# Altium PCB PCB Design.PcbDoc
Units mil, origin at the board's own origin, x right, y up, seen from the top; angles counter-clockwise.
Board outline 2100 x 900 mil, 2 copper layers (Top Layer, Bottom Layer), stack 62.249 mil thick; 30 components, 49 nets, 160 pads, 138 vias.
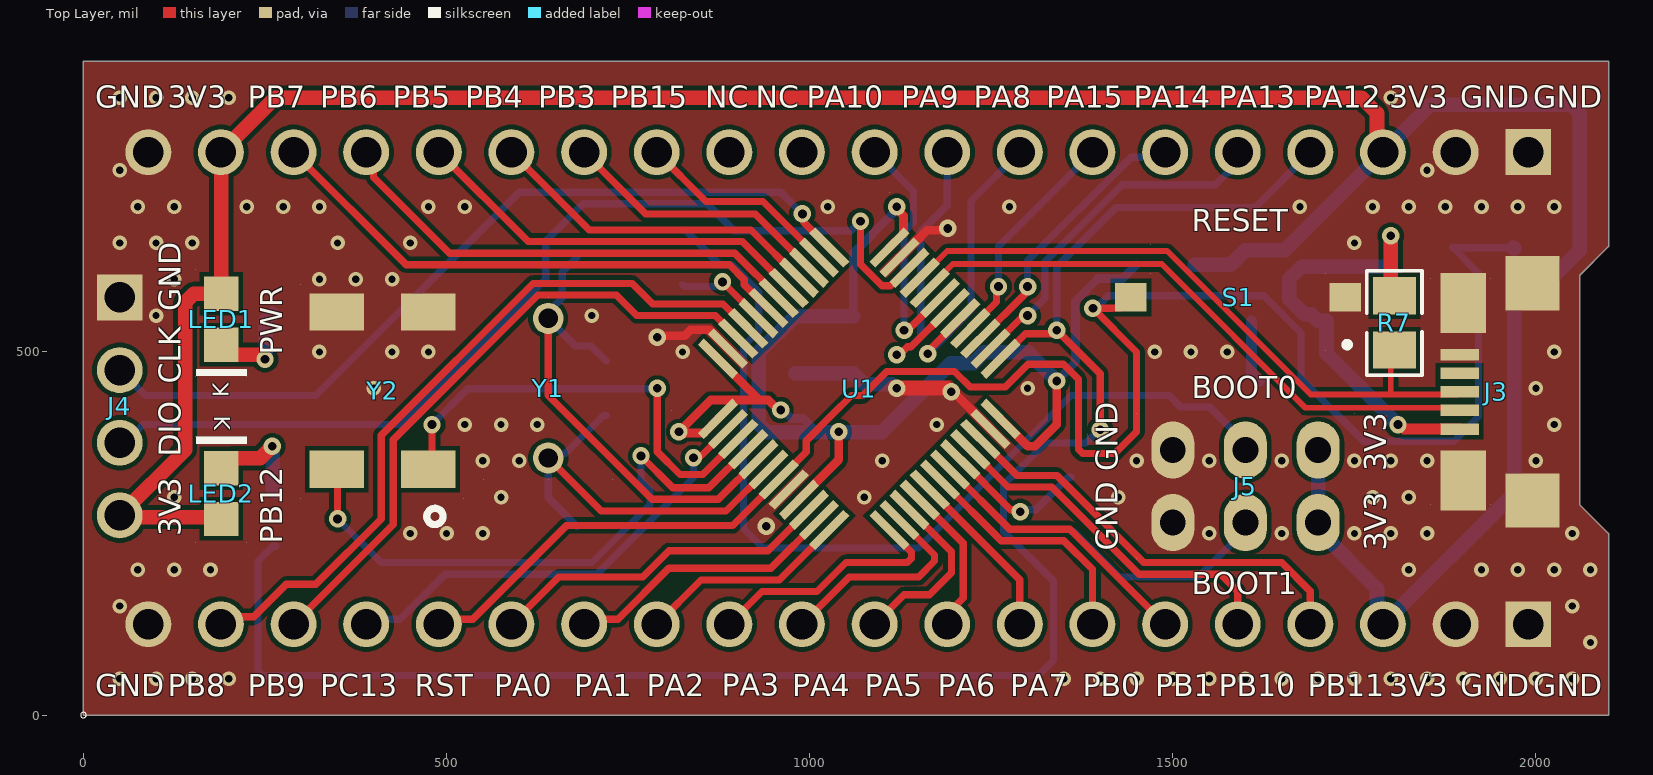
[diagram p0: Top Layer view]
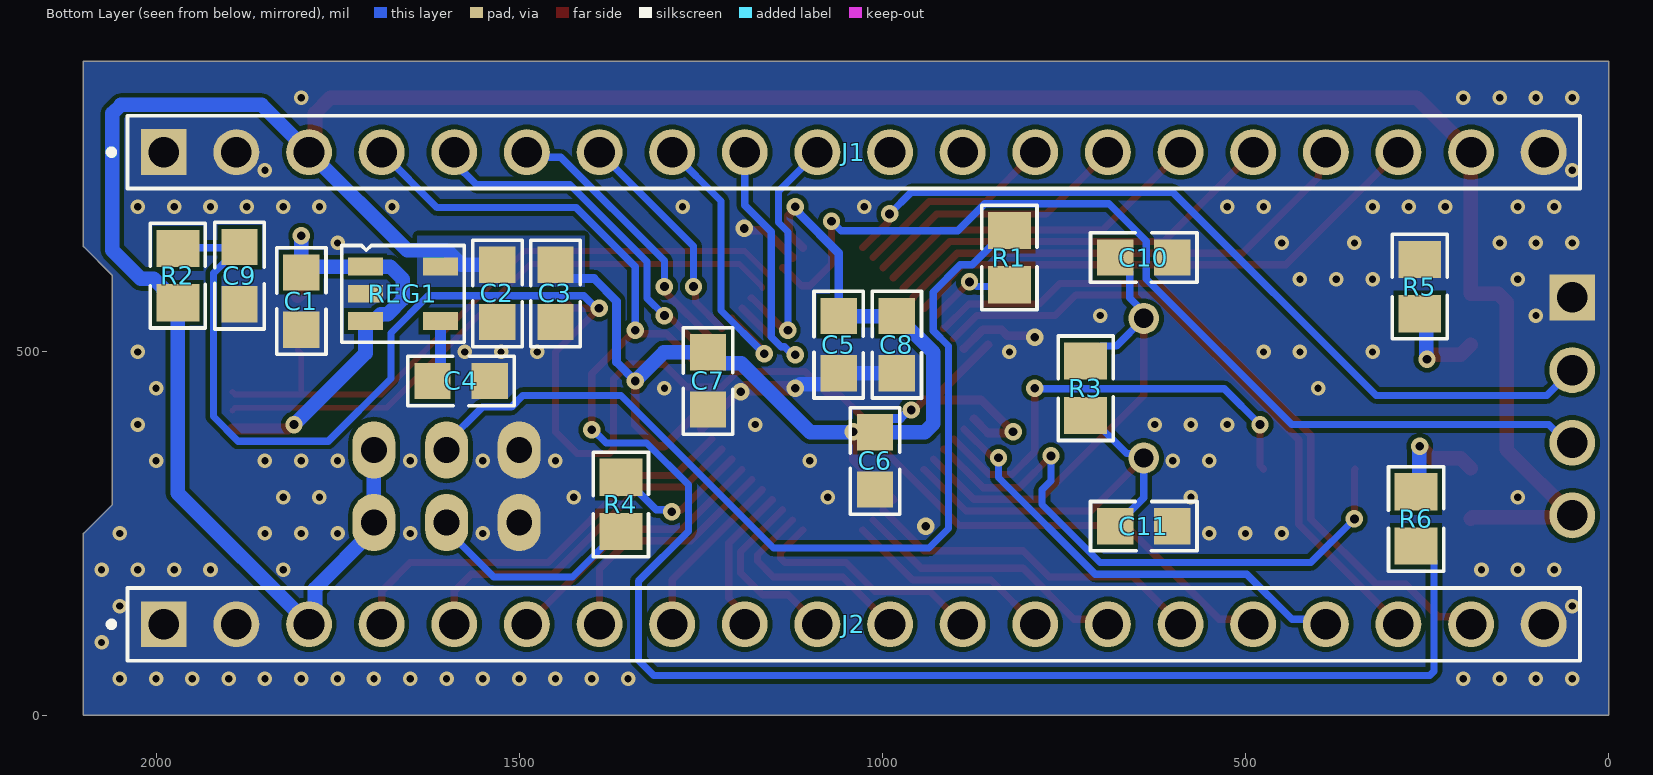
[diagram p1: Bottom Layer view, seen from below]

## Layer stack, top to bottom
Top Solder: solder mask 0.4, Solder Resist, Dk 3.5
Top Layer: signal copper 1.4
Dielectric 1: dielectric 59.4488, FR-4, Dk 4.6
Bottom Layer: signal copper 1.4
Bottom Solder: solder mask 0.4, Solder Resist, Dk 3.5

## Board outline
0,900 0,0 2100,0 2100,250 2060,290 2060,605 2100,645 2100,900

## Design rules (kind name [scope] priority, off if disabled: settings)
Clearance [All] p1: gap=6 ignorepadtopadclearanceinfootprint=TRUE
DiffPairsRouting DiffPair_90DiffPairsRouting [InDifferentialPairClass('diff_90')] p1: maxlimit=10 minlimit=10 mostfreqgap=10 toplayer_minwidth=8 toplayer_maxwidth=8 toplayer_prefwidth=8 bottomlayer_minwidth=8 bottomlayer_maxwidth=8 bottomlayer_prefwidth=8 maxuncoupledlength=500
DiffPairsRouting [All] p2: maxlimit=10 minlimit=10 mostfreqgap=10 toplayer_minwidth=15 toplayer_maxwidth=15 toplayer_prefwidth=15 bottomlayer_minwidth=15 bottomlayer_maxwidth=15 bottomlayer_prefwidth=15 maxuncoupledlength=500
MatchedLengths DiffPair_90MatchedLengths [InDifferentialPairClass('diff_90')] p1: tolerance=1000 checknetsindiffpair=FALSE checkdiffpairvsdiffpair=TRUE checkxsignals=TRUE checkothers=TRUE
MinimumSolderMaskSliver [All] p1: minsoldermaskwidth=0
PolygonConnect [All] p1: connectstyle=Direct reliefconductorwidth=10 reliefentries=4 polygonreliefangle="90 Angle" airgapwidth=10
RoutingVias [All] p1: holewidth=12 width=24 viastyle="Through Hole" minholewidth=12 minwidth=24 maxholewidth=12 maxwidth=24
SilkToSilkClearance [All] p1: silktosilkclearance=6
SilkToSolderMaskClearance [IsPad] p1: minsilkscreentomaskgap=0 clearancetoexposedcopper=TRUE
SolderMaskExpansion [All] p1: expansion=4 istentingtop=FALSE
SupplyNets "Schematic Supply Nets_2" [InNet('+3V3')] p1: voltage=0.000
SupplyNets "Schematic Supply Nets_1" [InNet('+5')] p2: voltage=0.000
SupplyNets "Schematic Supply Nets" [InNet('GND')] p3: voltage=0.000
Width [All] p1: maxlimit=40 minlimit=10 preferedwidth=10 minimp=50.000000 maximp=50.000000 favimp=50.000000
26 further rules are at their usual default settings.

## Classes and differential pairs
differential pair class diff_90: D
component class Schematic: C1 C2 C3 C4 J1 J2 J3 R7 REG1
component class Schematic2: C5 C6 C7 C8 C9 C10 C11 J4 J5 LED1 LED2 R1 R2 R3 R4 R5 R6 S1 U1 Y1 Y2
differential pair D: +D_P -D_N

## Components (designator, comment, footprint, x,y, rotation, side; value= is the part's Value field where it differs from the comment)
C1 "0.1uF" CAP_0805 1800,570 r90 bottom
C2 "0.1uF" CAP_0805 1530,580.63 r90 bottom
C3 "1uF" CAP_0805 1450,580.63 r90 bottom
C4 "22pF" CAP_0805 1580,460 r0 bottom
C5 "0.1uF" CAP_0805 1060,510 r90 bottom
C6 "0.1uF" CAP_0805 1010,350 r90 bottom locked
C7 "0.1uF" CAP_0805 1240,460 r90 bottom locked
C8 "0.1uF" CAP_0805 980,510 r90 bottom
C9 "0.1uF" CAP_0805 1885,605 r90 bottom
C10 "22pF" CAP_0805 640,630 r0 bottom locked
C11 "22pF" CAP_0805 640,260 r0 bottom locked
J1 "M20-9992045" HARWIN_M20-9992045 1039.37,775 r180 bottom
J2 "M20-9992045" HARWIN_M20-9992045 1039.37,125 r180 bottom
J3 "MICRO USB2.0" CON_10118192-0001LF_SMD 1945,445 r90 top locked
J4 "M20-9960445" HARWIN_M20-9960445 -88.98,425 r270 top locked
J5 "2X3 Berg Strip" CON6_100_59D78_TH_ST_Duplicate 1700,365 r180 top locked
LED1 "RED LED" LED_0805 190,545 r90 top locked
LED2 "RED LED" LED_0805 190,305 r270 top locked
R1 "10K" RES_0805 825,630 r270 bottom locked
R2 "10K" RES_0805 1970,605 r90 bottom
R3 "10Mohm" RES_0805 720,450 r90 bottom locked
R4 "10K" RES_0805 1360,290 r270 bottom
R5 "1K" RES_0805 260,590 r90 bottom locked
R6 "1K" RES_0805 265,270 r270 bottom locked
R7 "10K" RES_0805 1805,540 r90 top locked
REG1 "RT9193-33GB" SOT23-5 1660,580 r270 bottom
S1 "TS09-63-25-WT-160-SMT-TR" SW_TS09-63-25-WT-160-SMT-TR 1590,575 r180 top
U1 "STM32F103C8T6" LQFP-48_19.6_393_58X11_SMD 1068.3,449.26 r45 top
Y1 "ATS08A-E" XTAL_HC49P488W43L1085T450H368 640,450 r270 top locked
Y2 "32.768KHz" "XTAL_MC-405 32.7680K-G3" 349.02,338.46 r90 top locked

## Footprints (in the part's own frame and the unit in brackets; to place one, negate y for a bottom-side part, rotate by r counter-clockwise, add the part's x,y. Pads: shape width x height; smd on the part's side, far side on the other; paste and mask are expansions set on the pad)
CAP_0805 [mil] "Ceramic Capacitor"
  rect 50x50 smd mask+3: 1(-39.37,0) 2(39.37,0)
  silkscreen extent -73,-34 73,34, body extent -39,-25 39,25, height 31
CON6_100_59D78_TH_ST_Duplicate [mm] "Berg strip"
  oval 1.5x2 hole 0.9: 1(0,0) 2(0,2.54) 3(2.54,0) 4(2.54,2.54) 5(5.08,0) 6(5.08,2.54)
  silkscreen extent -1.27,-1.27 6.35,3.81, body extent -1.07,-1.27 6.15,3.56, height 8.18
CON_10118192-0001LF_SMD [mm] "USB2.0 MICRO"
  rect 0.4x1.35 smd: 1(-1.3,1.275) 2(-0.65,1.275) 3(0,1.275) 4(0.65,1.275) 5(1.3,1.275)
  rect 2.1x1.6 smd: 6(-3.1,1.15) 7(3.1,1.15)
  rect 1.9x1.9 smd: 8(-3.8,-1.275) 9(3.8,-1.275)
  silkscreen extent -3.95,0.18 3.95,2.3, body extent -4.04,-3.94 4.04,1.66, height 2.81
HARWIN_M20-9960445 [mm]
  rect 1.605x1.605 / inner round 1.605 / far side rect 1.605x1.605 hole 1.07: 1(-3.81,3.53)
  round 1.605 hole 1.07: 2(-1.27,3.53) 3(1.27,3.53) 4(3.81,3.53)
  silkscreen extent 10.7,2.16 10.89,2.36, body extent -5.08,-4.33 5.08,4.83, height 5.33
HARWIN_M20-9992045 [mm]
  rect 1.605x1.605 / inner round 1.605 / far side rect 1.605x1.605 hole 1.07 mask+0.102: 1(-24.13,0)
  round 1.605 hole 1.07 mask+0.102: 2(-21.59,0) 3(-19.05,0) 4(-16.51,0) 5(-13.97,0) 6(-11.43,0) 7(-8.89,0) 8(-6.35,0) 9(-3.81,0) 10(-1.27,0) 11(1.27,0) 12(3.81,0) 13(6.35,0) 14(8.89,0) 15(11.43,0) 16(13.97,0) 17(16.51,0) 18(19.05,0) 19(21.59,0) 20(24.13,0)
  silkscreen extent -26.06,-1.27 25.4,1.27, body extent -25.4,-1.27 25.4,1.27, height 8.74
LED_0805 [mm] "LED"
  rect 1.2x1.2 smd mask+0.076: A(0.889,0) K(-0.889,0)
  silkscreen extent -1.99,-0.89 1.73,0.89, body extent -1.01,-0.62 1.01,0.63, height 1.1
LQFP-48_19.6_393_58X11_SMD [mm] "48LQFP"
  rect 1.7x0.3 smd mask+0.076: 1(-4.238,2.75) 2(-4.238,2.25) 3(-4.238,1.75) 4(-4.238,1.25) 5(-4.238,0.75) 6(-4.238,0.25) 7(-4.238,-0.25) 8(-4.238,-0.75) 9(-4.238,-1.25) 10(-4.238,-1.75) 11(-4.238,-2.25) 12(-4.238,-2.75) 25(4.238,-2.75) 26(4.238,-2.25) 27(4.238,-1.75) 28(4.238,-1.25) 29(4.238,-0.75) 30(4.238,-0.25) 31(4.238,0.25) 32(4.238,0.75) 33(4.238,1.25) 34(4.238,1.75) 35(4.238,2.25) 36(4.238,2.75)
  rect 0.3x1.7 smd mask+0.076: 13(-2.75,-4.238) 14(-2.25,-4.238) 15(-1.75,-4.238) 16(-1.25,-4.238) 17(-0.75,-4.238) 18(-0.25,-4.238) 19(0.25,-4.238) 20(0.75,-4.238) 21(1.25,-4.238) 22(1.75,-4.238) 23(2.25,-4.238) 24(2.75,-4.238) 37(2.75,4.238) 38(2.25,4.238) 39(1.75,4.238) 40(1.25,4.238) 41(0.75,4.238) 42(0.25,4.238) 43(-0.25,4.238) 44(-0.75,4.238) 45(-1.25,4.238) 46(-1.75,4.238) 47(-2.25,4.238) 48(-2.75,4.238)
  silkscreen extent -5.16,-5.41 5.61,4.11, body extent -4.5,-4.5 4.5,4.5, height 1.7
RES_0805 [mm] "Resister"
  rect 1.3x1.5 smd mask+0.076: 1(0.95,0) 2(-0.95,0)
  silkscreen extent -1.83,-0.97 1.83,0.97, body extent -1,-0.63 1,0.62, height 0.5
SOT23-5 [mm] "CASE: SOT"
  rect 0.62x1.22 smd mask+0.076: 1(-0.953,-1.31) 2(-0.003,-1.31) 3(0.947,-1.31) 4(0.952,1.31) 5(-0.953,1.31)
  silkscreen extent -1.69,-2.14 1.69,2.14, body extent -1.5,-1.5 1.5,1.5, height 1.41
SW_TS09-63-25-WT-160-SMT-TR [mm]
  rect 1.1x1 smd: 1(-3.75,0) 2(3.75,0)
  silkscreen extent -3.91,-1.85 3.05,1.85, body extent -4.05,-1.85 4.05,1.85, height 2.5
XTAL_HC49P488W43L1085T450H368 [mm]
  round 1.08 hole 0.68: 1(-2.44,0) 2(2.44,0)
  silkscreen extent -3.17,-2.25 3.18,2.25, body extent -5.43,-2.25 5.43,2.25, height 3.68
"XTAL_MC-405 32.7680K-G3" [mm] "Crystal"
  rect 1.3x1.9 smd: 1(0,-3.2) 2(5.5,-3.2) 3(5.5,0) 4(0,0)
  silkscreen extent -1.93,-4.44 6.48,1.27, body extent -1.02,-4.44 6.48,1.27, height 3.6

## Part data
C1 C2 C5 C6 C7 C8 C9: library part CAP_0.1uF-50V-5%-0805, "0.1µF ±5% 50V Ceramic Capacitor X7R 0805 (2012 Metric)", Case/Package="0805 (2012 Metric)", Manufacturer=KEMET, Manufacturing Part Number=C0805C104J5RACTU, Supplier Part Number-1=399-1171-1-ND, Supplier-1=Digikey
C3: library part CAP_1uF-50V-5%-0805, "1µF ±5% 50V Ceramic Capacitor X7R 0805 (2012 Metric)", Case/Package="0805 (2012 Metric)", Manufacturer=Yageo, Manufacturing Part Number=CC0805JKX7R9BB105, Supplier Part Number-1=311-3498-1-ND, Supplier-1=Digikey
C4 C10 C11: library part CAP_22pF-50V-5%-0805, "22pF ±5% 50V Ceramic Capacitor C0G, NP0 0805 (2012 Metric)", Case/Package=0805, Manufacturer=KEMET, Manufacturer Part Number=C0805C220J5GACTU, Supplier Part Number-1=399-1113-1-ND, Supplier-1=Digikey
J1 J2: "2.54mm (0.1\") Pitch SIL Vertical Throughboard Pin Header, 6.1mm mating pin height, gold (hi-temp mould), 20 contacts", Package=None, Availability=Unavailable, Check_prices=https://www.snapeda.com/parts/M20-9992045/Harwin/view-part/?ref=eda, MF=Harwin, MP=M20-9992045, Price=None, SnapEDA_Link=https://www.snapeda.com/parts/M20-9992045/Harwin/view-part/?ref=snap
J3: library part CON-USB_10118192-0002LF-SMD, "USB - micro B USB 2.0 Receptacle Connector 5 Position Surface Mount, Right Angle", Case/Package=SMD, Manufacturer="Amphenol ICC (FCI)", Manufacturing Part Number=10118192-0002LF, Supplier Part Number-1=609-5379-1-ND, Supplier-1=Digikey
J4: "2.54mm (0.1) Pitch SIL Horizontal Throughboard Pin Header, 6.1mm mating pin height, gold (hi-temp mould), 4 contacts", Package=None, Check_prices=https://www.snapeda.com/parts/M20-9960445/Harwin+Inc./view-part/?ref=eda, MF=Harwin, MP=M20-9960445, SnapEDA_Link=https://www.snapeda.com/parts/M20-9960445/Harwin+Inc./view-part/?ref=snap
J5: library part CON-BS-PLG_2X3-100-TH-ST, "6 pin, 2 row, 2.54mm pitch bergstrip", Case/Package=TH, Manufacturer=NA, Manufacturer Part Number=NA, Supplier Part Number-1=NA, Supplier-1=NA
LED1 LED2: library part LED-RED_10mA-0805, "Red 621nm LED Indication - Discrete 2V 0805 (2012 Metric)", Case/ Package=0805, Manufacturer="Lite-On Inc.", Manufacturer Part Number=LTST-C170EKT, Supplier Part Number-1=160-1178-1-ND, Supplier-1=Digikey
R1 R2 R4 R7: library part RES_10K-0.125W-1%-0805, "10 kOhms ±1% 0.125W, 1/8W Chip Resistor 0805 (2012 Metric) Moisture Resistant Thick Film", Case/Package=0805, Manufacturer=Yageo, Manufacturing Part Number=RC0805FR-0710KL, Supplier Part Number-1=311-10.0KCRCT-ND, Supplier-1=Digikey
R3: library part RES_10MOHM-0.125W-1%-0805, "10 MOhms ±1% 0.125W, 1/8W Chip Resistor 0805 (2012 Metric) Automotive AEC-Q200, High Voltage Thick Film", Case/Package="0805 (2012 Metric)", Manufacturer="Rohm Semiconductor", Manufacturing Part Number=KTR10EZPF1005, Supplier Part Number-1=RHM10.0MAHCT-ND, Supplier-1=Digikey
R5 R6: library part RES_1K-0.125W-1%-0805, "1 kOhms ±1% 0.125W, 1/8W Chip Resistor 0805 (2012 Metric) Moisture Resistant Thick Film", Case/Package=0805, Manufacturer=垈㎵á, Manufacturer Part Number=RC0805FR-071KL, Supplier Part Number-1=311-1.00KCRCT-ND, Supplier-1=Digikey
REG1: library part REG_3.3V-5.5V-0.3A-SOT-23-5, "Linear Voltage Regulator IC 1 Output 300mA SOT-23-5", Case/ Package=SOT-23-5, Manufacturer="Richtek USA Inc.", Supplier Part Number-1=1028-1014-1-ND, Manufacturer Part Number=RT9193-33GB, Supplier-1=Digikey
S1: "6.1 x 3.7 mm, 2.5 mm Actuator Height, 160 gf, White, Surface Mount, SPST, Tactile Switch", Package=None, Check_prices=https://www.snapeda.com/parts/TS09-63-25-WT-160-SMT-TR/Same+Sky/view-part/?ref=eda, MF="Same Sky", MP=TS09-63-25-WT-160-SMT-TR, SnapEDA_Link=https://www.snapeda.com/parts/TS09-63-25-WT-160-SMT-TR/Same+Sky/view-part/?ref=snap
U1: library part "IC-STM32F103C8T6 _1", "ARM® Cortex®-M3 STM32F1 Microcontroller IC 32-Bit 72MHz 64KB (64K x 8) FLASH", Case/Package=48-LQFP, Manufacturer=STMicroelectronics, Supplier Part Number-1=497-6063-ND, Manufacturer Part Number=STM32F103C8T6, Supplier-1=Digikey
Y1: "8 MHz Â±30ppm Crystal 20pF 60 Ohms HC-49/US", Package="HC-49/US CTS-Frequency Controls", Check_prices=https://www.snapeda.com/parts/ATS08A-E/CTS+Components/view-part/?ref=eda, MF=CTS, MP=ATS08A-E, SnapEDA_Link=https://www.snapeda.com/parts/ATS08A-E/CTS+Components/view-part/?ref=snap
Y2: library part "XTAL_32.768KHz-MC-405 32.7680K-G3", "Crystals SMD AT XTL MHZ +/-50PPM 12.5 PF 250 T/R", Case/Package=SMD, Manufacturer=Epson, Manufacturing Part Number="MC-405 32.7680K-G3: ROHS", Supplier Part Number-1=732-MC405327680KG3RS, Supplier-1=Mouser

## Via types
v1: diameter 20, hole 10, Top Layer to Bottom Layer, tented both sides, 106 vias
v2: diameter 24, hole 12, Top Layer to Bottom Layer, tented both sides, 32 vias

## Nets (pads, with @x,y where several pads share a name; then routed paths per layer and width w, separated by ;. In a path a pad name is that pad's centre, name@x,y a point inside that pad or via, vN(x,y) a via of type N, cw(c..) or ccw(c..) an arc to the next point about the centre after c; other vN are vias at no path point)
+3V3: C2.2 C3.2 C5.2 C6.2 C7.2 C8.2 J1.3 J1.19 J2.3 J4.4 J5.1 J5.2 LED1.A LED2.A R2.2 REG1.5 U1.1 U1.9 U1.24 U1.36 U1.48 | length 6015.4
  Top Layer w12: U1.48@854.28,510.04 854.41,510.04 U1.48 930.69,433.76 ; U1.1 854.41,388.49 821.51,388.49 v2(820,390) 863.76,433.76 930.69,433.76 ; v2(960,420) 956.75,420 942.99,433.76 930.69,433.76 ; U1.9 1040,351.37 v2(1040,390) ; U1.36 1129.08,663.15 1129.08,687.67 1120,696.75 v2(1120,700) ; U1.24 1300.37,370.31 1310.31,370.31 1340,400 v2(1340,460)
  Top Layer w20: LED2.A 187.5,272.5 52.5,272.5 J4.4 140,365 140,568.28 151.72,580 LED1.A 189.69,580.32 189.69,774.68 J1.19 264.37,850 1760,850 1781.11,828.89 1781.11,783.26 J1.3
  Bottom Layer w12: v2(960,420) 963.25,420 974.87,408.37 991,408.37 C6.2 ; C5.2 1060,636.06 1114,690.06 1114,690.75 1120,696.75 v2(1120,700) ; v2(1340,460) 1366,486 1366,569.94 1397.06,601 1431,601 C3.2
  Bottom Layer w20: C5.2 C8.2 930,499.37 930,401.09 941.72,389.37 C6.2 1099.37,389.37 1194.37,484.37 1225,484.37 C7.2 1300.63,499.37 v2(1340,460) ; C2.2 1580,620 1600,640 1654.37,640 J1.3 1854.37,840 2048.28,840 2060,828.28 2060,640 2020.81,600.81 2003.22,600.81 1989.53,587.13 1989.53,583.19 1973.94,567.6 R2.2 1970,305.63 J2.3 1781.11,133.26 1781.11,174.05 1700,255.16 J5.2 J5.1
+5: C1.2 J3.1 R7.1 REG1.1 REG1.3 | length 648
  Top Layer w15: v2(1810,400) 1812.44,400 1818.62,393.82 J3.1
  Top Layer w20: v2(1800,660) 1800,582.4 R7.1
  Bottom Layer w20: v2(1800,660) 1800,617.21 C1.2 1792.17,617.21 1711.87,617.21 REG1.1 1711.28,617.21 1677.21,617.21 1660,600 1660,572.83 1680.93,551.9 1690.57,551.9 1699.77,542.7 REG1.3 1711.58,498.42 v2(1810,400)
BOOT0: J5.3 R1.2 | length 1300.5
  Bottom Layer w10: R1.2 828.93,667.4 876.33,620 892.53,620 930,582.53 930,529.07 909,508.07 909,256.86 935.86,230 1149.88,230 1359.88,440 1495.07,440 1511.08,424 1550.85,424 1600,374.84 J5.3
BOOT1: J5.4 R4.1 | length 302.8
  Bottom Layer w10: R4.1 1363.93,252.6 1426.53,190 1534.84,190 1600,255.16 J5.4
D_N: J3.2 U1.32 | length 827.1
  Top Layer w8: U1.32 1165.4,589.31 1196.99,620.9 1484.69,620.9 1682.39,423.2 1800,423.2 1862.35,423.2 1862.43,423.13 1891.09,423.13 J3.2
D_P: J3.3 R7.2 U1.33 | length 905.5
  Top Layer w8: U1.33 1152.68,602.04 1189.54,638.9 1492.15,638.9 1689.84,441.2 1800,441.2 ; R7.2 1800,497.6 1800,441.2 ; J3.3 1891.09,441.28 1862.43,441.28 1862.35,441.2 1800,441.2
GND: C1.1 C2.1 C3.1 C4.1 C5.1 C6.1 C7.1 C8.1 C9.1 C10.1 C11.1 J1.1 J1.2 J1.20 J2.1 J2.2 J2.20 J3.5 J3.6 J3.7 J3.8 J3.9 J4.1 J5.5 J5.6 R5.1 REG1.2 S1.1 U1.8 U1.23 U1.35 U1.47 Y2.2 Y2.3 | length 496.4
  Top Layer w12: v2(790,520) 792.3,522.3 827.77,522.3 836,530.53 861.63,530.53 887.55,504.61 U1.47 ; U1.35 1161.47,667.7 1187.7,667.7 v2(1190,670) ; v2(1194.8,445.2) 1197.5,445.2 1248.79,393.92 U1.23
  Top Layer w20: v2(1120,450) 1188.92,450 1193.72,445.2 v2(1194.8,445.2)
  Bottom Layer w20: C8.1 C5.1 1075,455.63 1113.28,455.63 1118.92,450 v2(1120,450)
  other v1: 50,50 100,50 150,50 200,50 1350,50 1400,50 1450,50 1500,50 1550,50 1600,50 1650,50 1700,50 1750,50 1800,50 1850,50 1900,50 1950,50 2000,50 2050,50 2075,100 50,150 2050,150 75,200 125,200 175,200 1825,200 1925,200 1975,200 2025,200 2075,200 450,250 500,250 550,250 1550,250 1650,250 1750,250 1800,250 1850,250 2050,250 125,300 575,300 1075,300 1425,300 1775,300 1825,300 550,350 600,350 1100,350 1450,350 1550,350 1650,350 1750,350 1800,350 1850,350 2000,350 525,400 575,400 625,400 1175,400 2025,400 400,450 1300,450 2000,450 325,500 425,500 475,500 825,500 1475,500 1525,500 1575,500 2025,500 100,550 700,550 125,600 325,600 375,600 425,600 50,650 100,650 150,650 350,650 450,650 1750,650 75,700 125,700 225,700 275,700 325,700 475,700 525,700 1025,700 1275,700 1675,700 1775,700 1825,700 1875,700 1925,700 1975,700 2025,700 50,750 1850,750 50,850 100,850 150,850 200,850 1800,850
  other v2: 940,260
NetC4_2: C4.2 REG1.4 | length 87
  Bottom Layer w15: REG1.4 1608.43,470.94 C4.2
NetLED1_K: LED1.K R5.2 | length 135
  Top Layer w20: LED1.K 203.63,496.38 242.54,496.38 248.92,490 v2(250,490)
  Bottom Layer w20: v2(250,490) 250.77,490.77 250.77,543.36 R5.2
NetLED2_K: LED2.K R6.2 | length 147.1
  Top Layer w20: LED2.K 203.62,353.62 243.62,353.62 v2(260,370)
  Bottom Layer w20: v2(260,370) 260.77,369.23 260.77,311.63 R6.2
NetR1_1: R1.1 U1.44 | length 129.2
  Top Layer w10: v2(880,596.4) 929.44,546.96 U1.44
  Bottom Layer w10: R1.1 827.59,590 869.81,590 876.21,596.4 v2(880,596.4)
NetR4_2: R4.2 U1.20 | length 202.4
  Top Layer w10: U1.20 1276.64,282.68 1287.32,282.68 v2(1290,280)
  Bottom Layer w10: v2(1290,280) 1292.68,282.68 1311.34,282.68 1356.06,327.4 R4.2
NRST: C9.2 J2.16 R2.1 S1.2 U1.7 | length 2513.6
  Top Layer w10: J2.16 496.2,131.83 535.96,131.83 664.97,260.84 893.8,260.84 U1.7 995.23,362.27 995.23,377.75 1030.47,413 1057.47,440 1072.96,440 1105.96,473 1199.53,473 1220.68,451.85 1269.53,451.85 1300.68,483 1349.53,483 1370,462.53 1370,365.86 1375.86,360 1420,360 1450,390 1450,500 v2(1390,560) 1417,560 1417.31,560.31 1427.68,560.31 S1.2
  Bottom Layer w10: v2(1390,560) 1393.66,560 1410.92,577.26 1625.45,577.26 1676.56,526.15 1676.56,463.44 1763,377 1887,377 1921,411 1921,608.37 C9.2 ; C9.2@1885.99,643.39 R2.1@1969.02,643.39
  Bottom Layer w20: R2.1@1969.02,643.39 R2.1
PA0: J2.15 U1.10 | length 474.9
  Top Layer w10: J2.15 654.37,190 770,190 806.22,226.22 942.69,226.22 U1.10
PA1: J2.14 U1.11 | length 383.1
  Top Layer w10: J2.14 696.2,131.83 735.96,131.83 806.13,202 946.31,202 U1.11
PA2: J2.13 U1.12 | length 291.2
  Top Layer w10: J2.13 850.37,186 958.15,186 U1.12
PA3: J2.12 U1.13 | length 340.1
  Top Layer w10: J2.12 934.37,170 1010,170 1050,210 1134.45,210 1140.31,215.86 1140.31,224.14 U1.13
PA4: J2.11 U1.14 | length 295.3
  Top Layer w10: J2.11 1054.37,190 1150,190 1172,212 1172,220.29 U1.14
PA5: J2.10 U1.15 | length 245.9
  Top Layer w10: J2.10 1129.89,165.52 1164.94,165.52 1195.28,195.86 1195.28,224.85 U1.15
PA6: J2.9 U1.16 | length 205.3
  Top Layer w10: U1.16 1211.28,236.69 1211.28,161.28 1189.37,139.37 J2.9
PA7: J2.8 U1.17 | length 236.8
  Top Layer w10: U1.17 1289.37,186.44 J2.8
PA8: J1.8 U1.29 | length 397.4
  Top Layer w10: v2(1162.53,497.47) 1162.53,500.45 1207.16,545.08 U1.29
  Bottom Layer w10: v2(1162.53,497.47) 1222.2,557.15 1222.2,707.83 J1.8
PA9: J1.9 U1.30 | length 412.6
  Top Layer w10: v2(1120,496) 1123.79,496 1134.79,507 1139.53,507 1192.81,560.28 U1.30
  Bottom Layer w10: v2(1120,496) 1123.79,496 1134.79,507 1139.53,507 1153,520.47 1153,665.53 1189.37,701.9 J1.9
PA10: J1.10 U1.31 | length 341.5
  Top Layer w10: v2(1130,530) 1132.68,532.68 1137.8,532.68 U1.31 U1.31@1180.6,574.2
  Bottom Layer w10: J1.10 1143,721.37 1143,678.15 1130,665.15 v2(1130,530)
PA11: J1.11
PA12: J1.12
PA15: J1.13 U1.38 | length 283.7
  Top Layer w10: J1.13 857.27,707.1 935.74,707.1 U1.38
PB0: J2.7 U1.18 | length 336.9
  Top Layer w10: U1.18 1263.64,240 1350,240 1389.37,200.63 J2.7
PB1: J2.6 U1.19 | length 384.5
  Top Layer w10: U1.19 1275.48,256 1358.37,256 J2.6
PB3: J1.14 U1.39 | length 375.5
  Top Layer w10: J1.14 774.37,690 925,690 U1.39
PB4: J1.15 U1.40 | length 467.4
  Top Layer w10: J1.15 696.37,668 919.16,668 U1.40
PB5: J1.16 U1.41 | length 559.2
  Top Layer w10: J1.16 612.37,652 907.32,652 U1.41
PB6: J1.17 U1.42 | length 666.1
  Top Layer w10: J1.17 399.55,764.82 399.55,740.45 504,636 896.76,636 957.28,575.48 U1.42
PB7: J1.18 U1.43 | length 747.1
  Top Layer w10: J1.18 444.37,620 889.53,620 909.98,599.55 909.98,592.38 942.08,560.28 U1.43
PB8: J2.19 U1.45 | length 1013.6
  Top Layer w10: J2.19 199.55,135.18 234.56,135.18 279.38,180 320,180 410,270 410,385.15 619.17,594.32 755.68,594.32 783.92,566.08 880.61,566.08 914.24,532.45 U1.45
PB9: J2.18 U1.46 | length 893.2
  Top Layer w10: J2.18 426.6,262.23 426.6,379.13 625.8,578.32 733.8,578.32 762.05,550.08 870.05,550.08 U1.46
PB10: J2.5 U1.21 | length 494.9
  Top Layer w10: U1.21 1273.16,314 1333.37,314 1453.37,194 1566,194 1589.37,170.63 J2.5
PB11: J2.4 U1.22 | length 586.7
  Top Layer w10: U1.22 1285,330 1340,330 1460,210 1650,210 1689.37,170.63 J2.4
PB12: J1.4 R6.1 U1.25 | length 2482.7
  Top Layer w10: U1.25 1297.11,524.96 1331.17,524.96 1336.21,530 v2(1340,530) 1400,470 v2(1400,393)
  Bottom Layer w10: R6.1 261.06,232.6 240.47,212 240.47,60.47 246.33,54.61 1314.61,54.61 1335.86,75.86 1335.86,184.14 1267,253 1267,317 1324.59,374.59 1380.22,374.59 1398.63,393 v2(1400,393) ; v2(1340,530) 1340,617.37 1421.31,698.69 1613.06,698.69 J1.4
PB13: J1.5 U1.26 | length 490.2
  Top Layer w10: U1.26 1291.63,547.32 1297.32,547.32 v2(1300,550)
  Bottom Layer w10: v2(1300,550) 1324,574 1324,624 1430,730 1558.76,730 1589.37,760.61 J1.5
PB14: J1.6 U1.27 | length 385.1
  Top Layer w10: U1.27 1297.32,580.85 1297.32,587.32 v2(1300,590)
  Bottom Layer w10: v2(1300,590) 1300,625.39 1442.78,768.17 1482.54,768.17 J1.6
PB15: J1.7 U1.28 | length 312.3
  Top Layer w10: U1.28 1257.32,568.69 1257.32,587.32 v2(1260,590)
  Bottom Layer w10: v2(1260,590) 1260,645.63 J1.7
PC13: J2.17 U1.2 | length 625.6
  Top Layer w10: v2(840,354.31) 842.3,356.61 850.37,356.61 U1.2
  Bottom Layer w10: J2.17 396.2,131.83 435.96,131.83 498.13,194 706.85,194 840,327.15 v2(840,354.31)
SWCLK: J4.2 U1.37 | length 1144.4
  Top Layer w10: v2(990,690) 992.68,687.32 992.68,678 U1.37
  Bottom Layer w10: J4.2 85,440 320,440 599.99,719.99 960.01,719.99 v2(990,690)
SWDIO: J4.3 U1.34 | length 1357.2
  Top Layer w10: v2(1070,680) 1070,620.64 1099.6,591.04 1111.36,591.04 1136.28,615.96 U1.34
  Bottom Layer w10: J4.3 57.45,375 82.45,400 436.19,400 636.63,600.44 636.63,652.81 687.81,703.99 859.08,703.99 896.07,667 1057,667 v2(1070,680)
XTALA: C10.2 R3.1 U1.5 Y1.1 | length 682.1
  Top Layer w10: Y1.1 640,440 783.02,296.98 874.26,296.98 U1.5
  Bottom Layer w10: C10.2 659.37,610 659.37,574.24 640,554.86 Y1.1 678.07,508 699.41,508 R3.1
XTALB: C11.2 R3.2 U1.6 Y1.2 | length 571.8
  Top Layer w10: Y1.2 712.96,280.98 884.82,280.98 942.08,338.24 U1.6
  Bottom Layer w10: C11.2 640,299.37 Y1.2 646.22,360.16 663.62,360.16 716.07,412.6 R3.2
XTALC: U1.3 Y2.1 | length 626.4
  Top Layer w10: Y2.1 480,343.46 v2(480,400) ; v2(790,450) 790,362.63 821.31,331.31 852.92,331.31 U1.3
  Bottom Layer w10: v2(480,400) 529.19,449.19 789.19,449.19 v2(790,450)
XTALD: U1.4 Y2.4 | length 816.8
  Top Layer w10: Y2.4 350,337.48 v2(350,270) ; v2(767.76,356.78) 811.56,312.98 861.14,312.98 914.24,366.08 U1.4
  Bottom Layer w10: v2(350,270) 410,210 700.23,210 780,289.77 780,310.37 767.76,322.62 v2(767.76,356.78)
pads on no net: J3.4

## Polygon pours and split planes (outlines as drawn)
GND on Bottom Layer "GND_L02_P002" (solid, remove dead copper, pour order 2): 0,900 0,0 2100,0 2100,250 2060,290 2060,604.67 2099.98,644.65 2099.98,899.75 2100.11,899.89 2100,900
+3V3 on Bottom Layer "+3V3_L02_P000" (solid, pour order 0): 1410,660 1640,660 1640,590 1410,590
GND on Top Layer "GND_L01_P001" (solid, pour order 1): 0,0 0,900 2100,900 2100.11,899.89 2100.11,644.97 2099.98,644.97 2059.84,604.83 2060,604.67 2060,290 2100,250 2100,0

## Other copper
Bottom Layer:
  drawing of 108 lines, arcs and shapes, not listed

## Silkscreen, mask and mechanical layers (free items; w line width, h text height)
Top Overlay:
  text "PA12" at 1680.7,836.53 h30
  text "GND" at 16,836 h30
  text "3V3" at 116,836 h30
  text "PB7" at 226,836 h30
  text "PB6" at 326,836 h30
  text "PB5" at 426,836 h30
  text "PB4" at 526,836 h30
  text "PB3" at 626,836 h30
  text "PB15" at 726,836 h30
  text "NC" at 856,836 h30
  text "NC" at 926,836 h30
  text "PA10" at 996,836 h30
  text "PA9" at 1126,836 h30
  text "PA8" at 1226,836 h30
  text "PA15" at 1326,836 h30
  text "PA14" at 1446,836 h30
  text "PA13" at 1563.46,836.03 h30
  text "3V3" at 1798.18,836.06 h30
  text "GND" at 1896,836 h30
  text "GND" at 1996,836 h30
  text "RESET" at 1526,666 h30
  text "GND" at 134,556 h30 r90
  text "PWR" at 274,496 h30 r90
  text "CLK" at 134,456 h30 r90
  text "BOOT0" at 1526,436 h30
  text "DIO" at 134,356 h30 r90
  text "GND" at 1424,336 h30 r90
  text "3V3" at 1794,336 h30 r90
  text "3V3" at 134,246 h30 r90
  text "PB12" at 274,236 h30 r90
  text "GND" at 1424,226 h30 r90
  text "3V3" at 1794,226 h30 r90
  text "BOOT1" at 1526,166 h30
  text "PA3" at 878.67,26.73 h30
  text "GND" at 16,26 h30
  text "PB8" at 116,26 h30
  text "PB9" at 226,26 h30
  text "PC13" at 326,26 h30
  text "RST" at 456,26 h30
  text "PA0" at 566,26 h30
  text "PA1" at 676,26 h30
  text "PA2" at 776,26 h30
  text "PA4" at 976,26 h30
  text "PA5" at 1076,26 h30
  text "PA6" at 1176,26 h30
  text "PA7" at 1276,26 h30
  text "PB0" at 1376,26 h30
  text "PB1" at 1476,26 h30
  text "PB10" at 1563.46,26.03 h30
  text "PB11" at 1686,26 h30
  text "3V3" at 1798.18,26.06 h30
  text "GND" at 1896,26 h30
  text "GND" at 1996,26 h30
Bottom Solder:
  drawing of 108 lines, arcs and shapes, not listed
Mechanical 1:
  lines w10: 2100,0 0,0 0,900 2100,900

## Text inside footprints (layer, text, board x,y; h text height)
LED1: Top Overlay "A" at 0,0 h0 r90; Top Overlay "K" at 199.85,437.72 h22 r90
LED2: Top Overlay "A" at 0,0 h0 r270; Top Overlay "K" at 180.15,412.28 h22 r270